# Altium PCB PCB1.PcbDoc
Units mm, origin at the board's own origin, x right, y up, seen from the top; angles counter-clockwise.
Board outline 65 x 30 mm, 2 copper layers (Top Layer, Bottom Layer), stack 1.201 mm thick; 42 components, 61 nets, 241 pads, 182 vias.
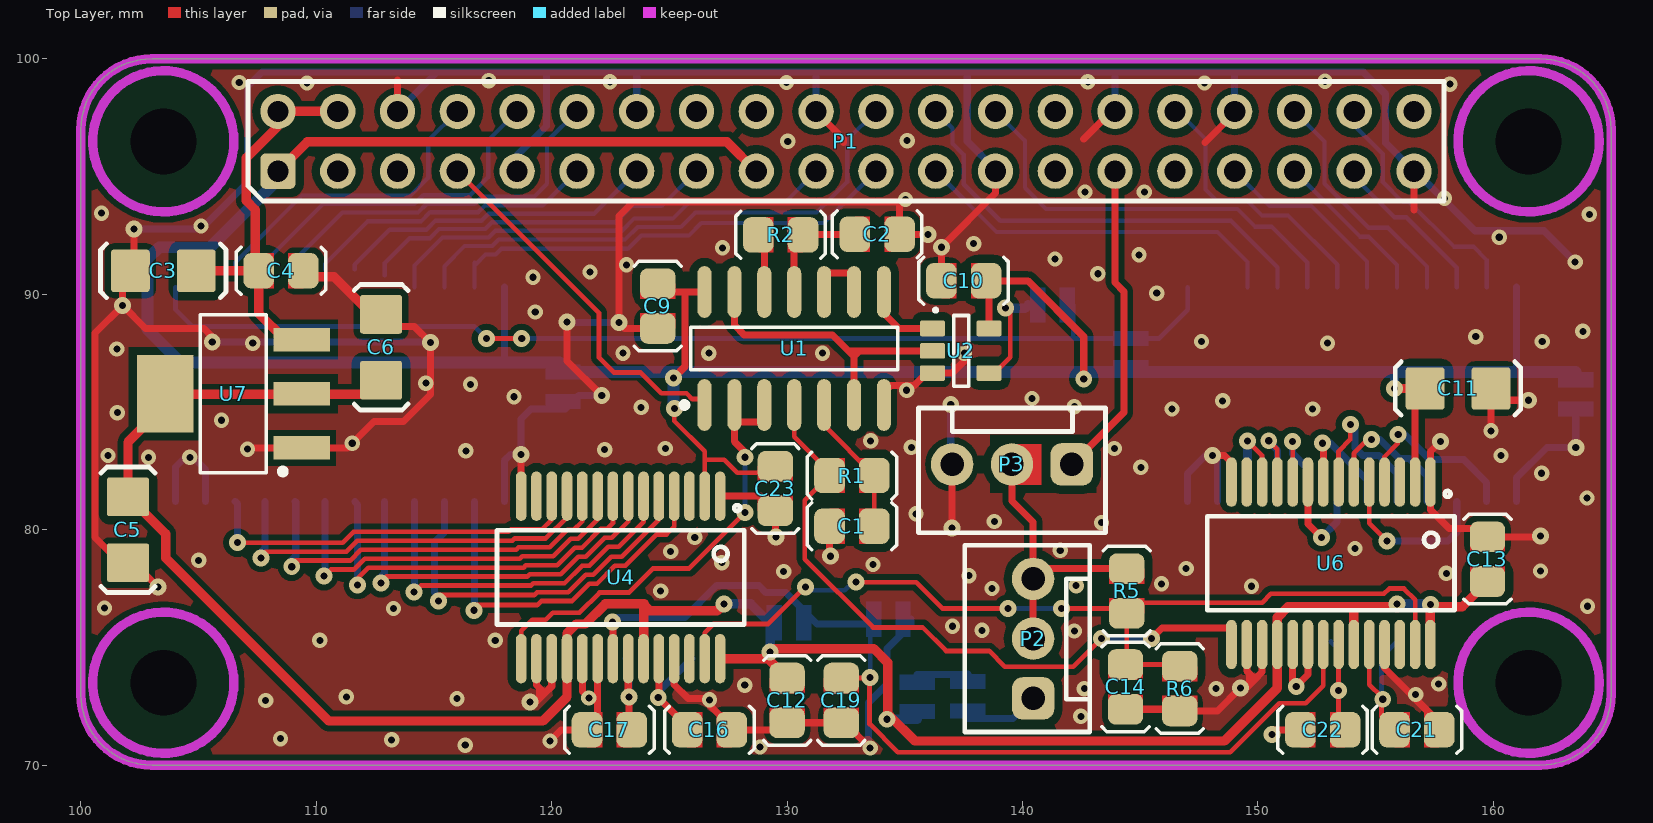
[diagram p0: Top Layer view]
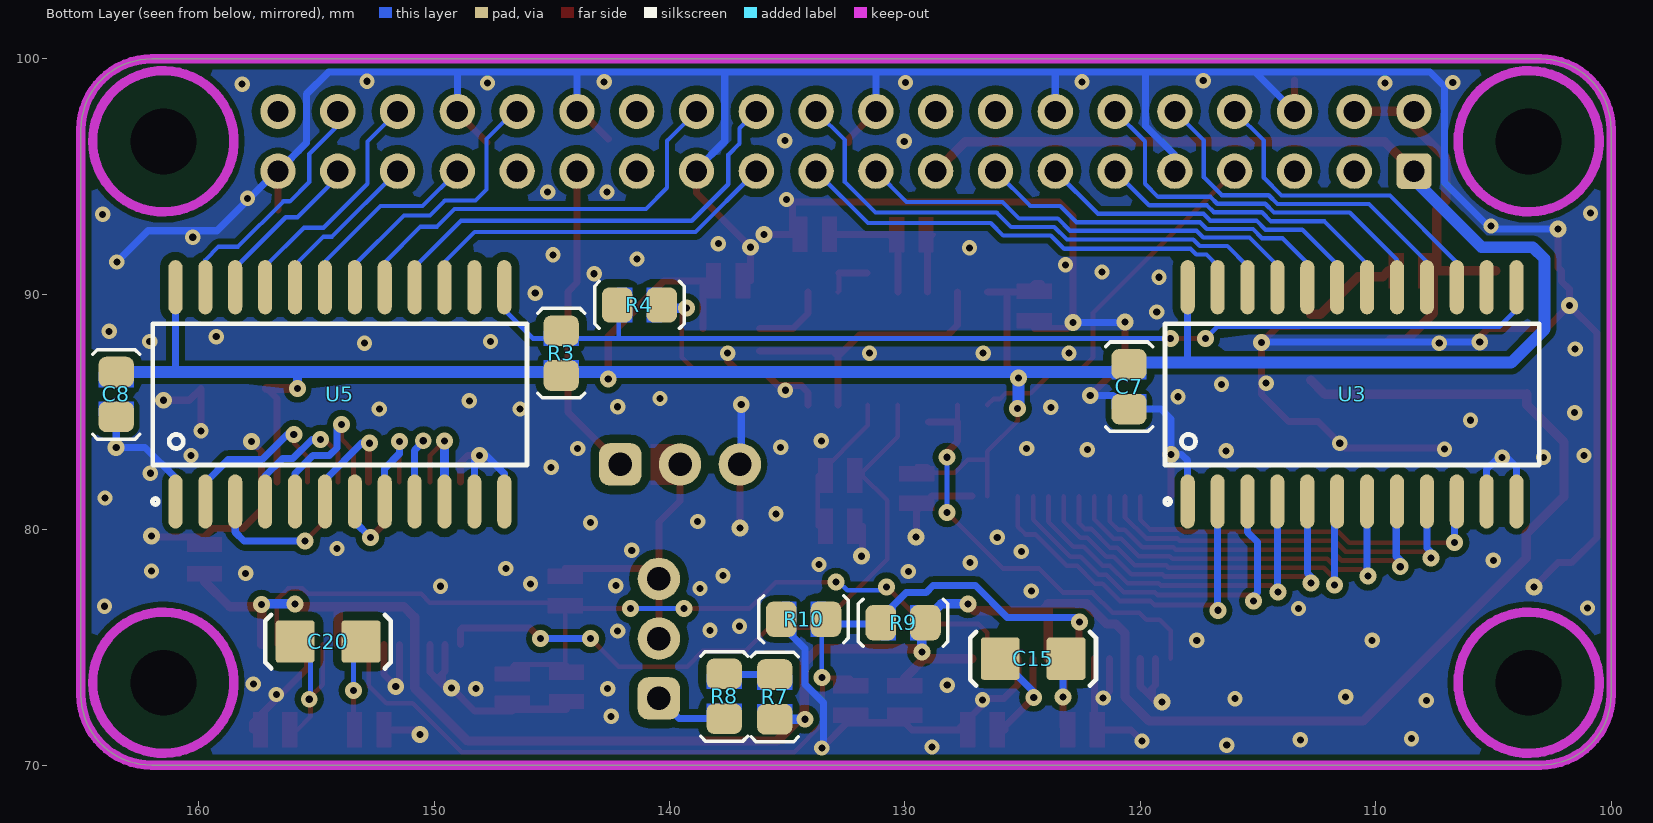
[diagram p1: Bottom Layer view, seen from below]

## Layer stack, top to bottom
Top Solder: solder mask 0.0102, Solder Resist, Dk 3.5
Top Layer: signal copper 0.0356
Dielectric 1: dielectric 1.13, FR-4, Dk 4.8
Bottom Layer: signal copper 0.0356
Bottom Solder: solder mask 0.0102, Solder Resist, Dk 3.5

## Board outline
100,73 100,97 cw(c103,97) 103,100 162,100 cw(c162,97) 165,97 165,73 cw(c162,73) 162,70 103,70 cw(c103,73)

## Design rules (kind name [scope] priority, off if disabled: settings)
Clearance Clearance_2 [Name Like '*-1111'] p1: gap=1
Clearance Clearance_1 [InPolygon vs IsPad] p2: gap=0.356
Clearance Clearance_3 [InPolygon] p3: gap=0.25
Clearance [All] p4: gap=0.18
HoleSize [All] p1 off: absolutevalues=TRUE maxlimit=2.54 minlimit=0.025 maxpercent=80.000 minpercent=20.000
PasteMaskExpansion [All] p1: expansion=0.05
PolygonConnect PolygonConnect_1 [All vs IsVia] p1: connectstyle=Direct reliefconductorwidth=0.254 reliefentries=4 polygonreliefangle="90 Angle" airgapwidth=0.254
PolygonConnect [All] p2: connectstyle=NoConnect reliefconductorwidth=0.254 reliefentries=4 polygonreliefangle="90 Angle" airgapwidth=0.254
RoomDefinition Sheet1 [InComponentClass('Sheet1')] p1 off: confinementstyle=ConfineIn formatcopy=TRUE lockcomponents=FALSE outline 511,187.625 493.601,187.625 493.601,140 511,140
RoutingVias [All] p1: holewidth=0.3 width=0.72 viastyle="Through Hole" minholewidth=0.3 minwidth=0.72 maxholewidth=0.3 maxwidth=0.72
SolderMaskExpansion [All] p1: expansion=0.102
Width [All] p1: maxlimit=3.048 minlimit=0.18 preferedwidth=0.18
27 further rules are at their usual default settings.

## Components (designator, comment, footprint, x,y, rotation, side; value= is the part's Value field where it differs from the comment)
C1 "100p" 0805RC 132.75,80.15 r0 top
C2 "N.S." 0805RC 133.825,92.55 r180 top
C3 "10u" 1206RC 103.5,91 r0 top
C4 "0.1u" 0805RC 108.5,91 r180 top
C5 "10u" 1206RC 102,80 r90 top
C6 "10u" 1206RC 112.75,87.75 r270 top
C7 "0.1u" 0805RC 120.475,86.075 r90 bottom
C8 "0.1u" 0805RC 163.5,85.75 r90 bottom
C9 "0.1u" 0805RC 124.5,89.5 r90 top
C10 "0.1u" 0805RC 137.5,90.575 r0 top
C11 "10u" 1206RC 158.5,86 r180 top
C12 "0.1u" 0805RC 130,72.75 r90 top
C13 "0.1u" 0805RC 159.75,78.75 r270 top
C14 "N.S." 0805RC 144.375,73.325 r90 top
C15 "10u" 1206RC 124.55,74.525 r0 bottom
C16 "0.1u" 0805RC 126.7,71.5 r0 top
C17 "0.1u" 0805RC 122.45,71.5 r0 top
C19 "0.1u" 0805RC 132.3,72.75 r90 top
C20 "10u" 1206RC 154.5,75.25 r0 bottom
C21 "0.1u" 0805RC 156.75,71.5 r0 top
C22 "0.1u" 0805RC 152.75,71.5 r0 top
C23 "0.1u" 0805RC 129.5,81.75 r90 top
P1 "Header 20X2" PLD-40 132.5,96.5 r0 top locked
P2 "Header 3" WF-3 140.45,75.375 r270 top
P3 "Header 3" WF-3 139.55,82.775 r0 top
R1 "100" 0805R 132.75,82.3 r0 top
R2 "51" 0805R 129.725,92.525 r0 top
R3 "N.S." 0805R 144.6,87.5 r270 bottom
R4 "0" 0805R 141.275,89.55 r0 bottom
R5 "1k" 0805R 144.425,77.4 r90 top
R6 "1k" 0805R 146.675,73.25 r90 top
R7 "1k" 0805R 135.525,72.9 r270 bottom
R8 "1k" 0805R 137.675,72.925 r270 bottom
R9 "150" 0805R 130.075,76.05 r180 bottom
R10 "150" 0805R 134.3,76.2 r180 bottom
U1 "74LVC14AD" M14A_N 130.3,87.7 r90 top
U2 "SN74LVC1G02DBV" SOT-23-5L 137.375,87.6 r0 top
U3 "SN74LVC841ADW" DW024_N 111,85.75 r90 bottom
U4 "AD9200AR" RS-28_N 122.925,77.975 r270 top
U5 "SN74LVC841ADW" DW024_N 154,85.75 r90 bottom
U6 "AD9200AR" RS-28_N 153.1,78.575 r270 top
U7 "LD1117S33TR" SOT223-4N 106.475,85.775 r180 top

## Footprints (in the part's own frame and the unit in brackets; to place one, negate y for a bottom-side part, rotate by r counter-clockwise, add the part's x,y. Pads: shape width x height; smd on the part's side, far side on the other; paste and mask are expansions set on the pad)
0805R [mm] "Chip Resistor"
  rrect50% 1.3x1.5 smd paste-5 mask+0.102: 1(-0.95,0) 2(0.95,0)
  Top Layer region: 0.3,-0.75 0.95,-0.75 0.95,0.75 0.3,0.75
  Top Layer region: -0.95,-0.75 -0.3,-0.75 -0.3,0.75 -0.95,0.75
  silkscreen extent -1.9,-1 1.9,1, body extent -1.15,-0.67 1.15,0.68, height 0.76
0805RC [mm] "Chip Capacitor"
  rrect50% 1.3x1.5 smd paste-5 mask+0.102: 1(-0.95,0) 2(0.95,0)
  Top Layer region: -0.95,-0.75 -0.3,-0.75 -0.3,0.75 -0.95,0.75
  Top Layer region: 0.3,-0.75 0.95,-0.75 0.95,0.75 0.3,0.75
  silkscreen extent -1.9,-1 1.9,1, body extent -0.95,-0.56 1.05,0.64, height 1.2
1206RC [mm] "Chip Capacitor"
  rrect15% 1.65x1.8 smd paste-5: 1(-1.4,0) 2(1.4,0)
  silkscreen extent -2.67,-1.14 2.67,1.14, body extent -1.6,-0.81 1.6,0.79, height 1.6
DW024_N [mm] "SOIC, 24-Leads, Body 15.4x7.5mm, Pitch 1.27mm, IPC Medium Density"
  oval 2.3x0.6 smd: 1(-4.55,6.985) 2(-4.55,5.715) 3(-4.55,4.445) 4(-4.55,3.175) 5(-4.55,1.905) 6(-4.55,0.635) 7(-4.55,-0.635) 8(-4.55,-1.905) 9(-4.55,-3.175) 10(-4.55,-4.445) 11(-4.55,-5.715) 12(-4.55,-6.985) 13(4.55,-6.985) 14(4.55,-5.715) 15(4.55,-4.445) 16(4.55,-3.175) 17(4.55,-1.905) 18(4.55,-0.635) 19(4.55,0.635) 20(4.55,1.905) 21(4.55,3.175) 22(4.55,4.445) 23(4.55,5.715) 24(4.55,6.985)
  silkscreen extent -4.67,-7.95 3,7.96, body extent -5.25,-7.82 5.15,7.58, height 2.6
M14A_N [mm] "SOIC, 14-Leads, Body 8.6x3.9mm, Pitch 1.27mm, IPC Medium Density"
  oval 2.2x0.6 smd paste-5: 1(-2.4,3.81) 2(-2.4,2.54) 3(-2.4,1.27) 4(-2.4,0) 5(-2.4,-1.27) 6(-2.4,-2.54) 7(-2.4,-3.81) 8(2.4,-3.81) 9(2.4,-2.54) 10(2.4,-1.27) 11(2.4,0) 12(2.4,1.27) 13(2.4,2.54) 14(2.4,3.81)
  silkscreen extent -2.52,-4.4 0.9,4.78, body extent -3,-4.37 3,4.38, height 1.75
PLD-40 [mm] "Connector 20x2"
  rrect30% 1.5x1.5 hole 0.9: 1(-24.13,-1.27)
  round 1.5 hole 0.9: 2(-24.13,1.27) 3(-21.59,-1.27) 4(-21.59,1.27) 5(-19.05,-1.27) 6(-19.05,1.27) 7(-16.51,-1.27) 8(-16.51,1.27) 9(-13.97,-1.27) 10(-13.97,1.27) 11(-11.43,-1.27) 12(-11.43,1.27) 13(-8.89,-1.27) 14(-8.89,1.27) 15(-6.35,-1.27) 16(-6.35,1.27) 17(-3.81,-1.27) 18(-3.81,1.27) 19(-1.27,-1.27) 20(-1.27,1.27) 21(1.27,-1.27) 22(1.27,1.27) 23(3.81,-1.27) 24(3.81,1.27) 25(6.35,-1.27) 26(6.35,1.27) 27(8.89,-1.27) 28(8.89,1.27) 29(11.43,-1.27) 30(11.43,1.27) 31(13.97,-1.27) 32(13.97,1.27) 33(16.51,-1.27) 34(16.51,1.27) 35(19.05,-1.27) 36(19.05,1.27) 37(21.59,-1.27) 38(21.59,1.27) 39(24.13,-1.27) 40(24.13,1.27)
  silkscreen extent -25.4,-2.54 25.4,2.54, body extent -25.4,-2.54 25.4,2.54, height 8.54
RS-28_N [mm] "SOP, 28-Leads, Body 10.2x5.3mm, Pitch 0.65mm, IPC Medium Density"
  oval 2.1x0.45 smd: 1(-3.45,4.225) 2(-3.45,3.575) 3(-3.45,2.925) 4(-3.45,2.275) 5(-3.45,1.625) 6(-3.45,0.975) 7(-3.45,0.325) 8(-3.45,-0.325) 9(-3.45,-0.975) 10(-3.45,-1.625) 11(-3.45,-2.275) 12(-3.45,-2.925) 13(-3.45,-3.575) 14(-3.45,-4.225) 15(3.45,-4.225) 16(3.45,-3.575) 17(3.45,-2.925) 18(3.45,-2.275) 19(3.45,-1.625) 20(3.45,-0.975) 21(3.45,-0.325) 22(3.45,0.325) 23(3.45,0.975) 24(3.45,1.625) 25(3.45,2.275) 26(3.45,2.925) 27(3.45,3.575) 28(3.45,4.225)
  silkscreen extent -3.07,-5.25 2,5.25, body extent -3.88,-5.16 3.88,5.17, height 2.15
SOT223-4N [mm] "SOT223, 4-Leads, Body 6.5x3.5mm, Pitch 2.3mm, Lead Span 7mm, IPC Medium Density"
  rect 2.4x1 smd: 1(-2.9,2.3) 2(-2.9,0) 3(-2.9,-2.3)
  rect 2.4x3.3 smd: 4(2.9,0)
  silkscreen extent -2.23,-3.35 1.4,3.42, body extent -3.54,-3.25 3.54,3.25, height 1.65
SOT-23-5L [mm] "SOT23, 5-Leads, Body 2.9x1.6mm, Pitch 0.95mm, Lead Span 2.8mm, IPC Medium Density"
  rrect25% 1.067x0.671 smd paste-5: 1(-1.2,0.95) 2(-1.2,0) 3(-1.2,-0.95) 4(1.2,-0.95) 5(1.2,0.95)
  silkscreen extent -1.14,-1.5 0.33,1.8, body extent -1.33,-1.5 1.17,1.5, height 1.1
WF-3 [mm]
  rrect50% 1.8x1.8 hole 1: 1(2.54,0)
  round 1.8 hole 1: 2(0,0) 3(-2.54,0)
  silkscreen extent -3.97,-2.9 3.97,2.4, body extent -3.9,-3.2 3.9,2.7, height 11.73

## Part data
C1 C2 C3 C4 C5 C6 C7 C8 C9 C10 C11 C12 C13 C14 C15 C16 C17 C19 C20 C21 C22 C23: library part Cap, "Capacitor"
P1: "Header, 40-Pin"
P2 P3: "WF-3 etc"
R1 R2 R3 R4 R5 R6 R7 R8 R9 R10: library part Res1, "Resistor"
U1: library part 74ACT14SC, "Hex Schmitt-Trigger Inverter, 14-Pin SOIC, Commercial Grade"
U3 U5: "10-Bit Bus-Interface D-Type Latch with 3-State Outputs"
U4 U6: "Single 10-bit ADC Parallel 20MSPS"
U7: "Fixed Low Drop Positive Voltage Regulator, 3.3V, 4-Pin SOT-223, Tape and Reel"

## Free pads (board coordinates)
  round 0 hole 2.8 unplated: 0(103.5,73.5) 0(103.5,96.5) 0(161.5,73.5) 0(161.5,96.5)

## Via types
v1: diameter 0.65, hole 0.3, Top Layer to Bottom Layer, tented both sides, 114 vias
v2: diameter 0.72, hole 0.3, Top Layer to Bottom Layer, tented both sides, 68 vias

## Nets (pads, with @x,y where several pads share a name; then routed paths per layer and width w, separated by ;. In a path a pad name is that pad's centre, name@x,y a point inside that pad or via, vN(x,y) a via of type N, cw(c..) or ccw(c..) an arc to the next point about the centre after c; other vN are vias at no path point)
+5V: C3.2 C4.2 P1.2 P1.4 U7.3 | length 16.6
  Top Layer w0.4: C3.2 C4.2 107.55,89.2 108.675,88.075 U7.3 ; C4.2@107.406,91.144 107.406,93.594 107.028,93.972 107.028,95.798 108.37,97.14 P1.2 P1.4
A_IN: P1.29 P3.1 | length 13.5
  Top Layer w0.3: P3.1 144.3,84.985 144.3,90.125 143.93,90.495 P1.29
ADC_CLK1: U1.2 U1.3 U4.15 | length 18.9
  Top Layer w0.2: U4.15 118.7,75.7 119.175,76.175 119.75,76.175 120.05,76.475 121.175,76.475 122.03,77.33 123.28,77.33 124.3,78.35 125.827,78.35 v2(128.206,80.729) ; U1.2 U1.2@127.76,84.585 ; v2@128.2,83.3 128.2,83 128.206,83.006 v2(128.206,83.079) ; U1.2@127.76,84.585 127.76,84.575 127.75,84.575 U1.2@127.76,84.585
  Top Layer w0.3: v2@128.2,83.3 127.76,83.74 127.76,84.575 U1.3@129,84.575
  Bottom Layer w0.2: v2(128.206,80.729) v2(128.206,83.079)
ADC_CLK2: R1.1 U1.4 U6.15 | length 29
  Top Layer w0.2: U1.4 130.3,83.95 131.8,82.45 R1.1 130.75,81.25 130.75,78.75 133.65,75.85 135.75,75.85 136.75,74.85 138.575,74.85 139.25,74.175 142.15,74.175 v2(143.35,75.375)
  Top Layer w0.3: v2(145.475,75.375) 145.925,75.825 148.8,75.825 148.875,75.75 U6.15
  Bottom Layer w0.3: v2(143.35,75.375) v2(145.475,75.375)
AVCC: C5.2 C6.2 C12.2 C13.2 R7.2 R9.2 U4.18 U4.23 U4.28 U6.18 U6.23 U6.28 U7.2 U7.4 | length 100.1
  Top Layer w0.4: C6.2 112.15,85.75 103.6,85.75 U7.4 103.575,85.3 102,83.725 C5.2 102.025,81.4 103.6,79.825 103.6,78.8 110.525,71.875 119.625,71.875 120.65,72.9 120.65,75.6 121.045,75.995 121.424,75.995 122.279,76.85 123.925,76.85 ; U4.23 123.9,76.825 124.175,76.55 127.025,76.55 v2(127.325,76.85) ; U4.28 129.175,74.525 C12.2 ; v2(129.275,74.8) 129.425,74.95 133.675,74.95 134.265,74.36 v2@134.265,71.965 ; v2(134.25,71.95) v2@134.265,71.965 ; v2@134.35,72.05 v2@134.265,71.965 ; v2@134.375,72.075 135.425,71.025 148.575,71.025 150.825,73.275 U6.18 150.825,76.275 151.275,76.725 154.075,76.725 ; U6.23 154.075,76.725 ; v2(155.9,76.85) 155.9,76.725 154.075,76.725 ; U6.28 157.325,76.725 158.675,76.725 C13.2
  Bottom Layer w0.4: v2(127.325,76.85) 128.45,76.85 129.275,76.025 v2(129.275,74.8) v2@129.35,74.8 ; v2(134.25,71.95) R7.2 ; v2(155.9,76.85) 157.3,76.85 v2(157.325,76.825)
CLK_IN: P1.7 U1.1 | length 15.7
  Top Layer w0.2: P1.7 122.006,89.214 122.006,87.319 122.644,86.681 123.769,86.681 124.65,85.8 125.725,85.8 125.975,85.55 126.24,85.55 U1.1
DA0: P1.21 U3.23 | length 19.8
  Bottom Layer w0.18: U3.23 U3.23@116.715,91.215 ; U3.23@116.715,91.34 U3.23@116.715,91.215 ; P1.21 131.565,93.025 126.35,93.025 125.825,92.5 123.8,92.5 123.233,91.933 117.867,91.933 117.624,91.69 117.19,91.69 U3.23@116.715,91.215
DA1: P1.22 U3.22 | length 23
  Bottom Layer w0.18: U3.22 115.445,91.195 116.3,92.05 117.475,92.05 117.75,92.325 123.116,92.325 123.651,92.86 125.485,92.86 126.1,93.475 131.25,93.475 132.55,94.775 132.55,96.55 P1.22
DA2: P1.19 U3.21 | length 19.6
  Bottom Layer w0.18: U3.21 114.175,91.222 115.363,92.41 117.326,92.41 117.616,92.7 122.982,92.7 123.502,93.22 125.145,93.22 125.85,93.925 129.925,93.925 P1.19
DA3: P1.15 U3.20 | length 15.4
  Bottom Layer w0.18: U3.20@112.905,90.8 112.905,91.33 113.955,92.38 114.824,92.38 115.214,92.77 117.177,92.77 117.467,93.06 122.71,93.06 123.4,93.75 124.67,93.75 P1.15
DA4: P1.13 U3.19 | length 13.8
  Bottom Layer w0.18: U3.19@111.635,91.05 111.635,91.26 113.115,92.74 114.675,92.74 115.065,93.13 117.028,93.13 117.318,93.42 121.8,93.42 P1.13
DA5: P1.11 U3.18 | length 12.6
  Bottom Layer w0.18: U3.18@110.365,91.05 110.365,91.29 112.175,93.1 114.45,93.1 114.84,93.49 116.879,93.49 117.169,93.78 119.62,93.78 P1.11
DA6: P1.12 U3.17 | length 16.1
  Bottom Layer w0.18: U3.17@109.095,91.05 109.095,91.47 111.1,93.475 114.316,93.475 114.691,93.85 116.729,93.85 117.019,94.14 119.24,94.14 119.8,94.7 119.8,96.5 P1.12
DA7: P1.10 U3.16 | length 14.6
  Bottom Layer w0.18: U3.16@107.825,91.05 107.825,91.375 110.285,93.835 114.167,93.835 114.542,94.21 116.535,94.21 117.3,94.975 117.3,96.54 P1.10
DA8: P1.8 U3.15 | length 13.3
  Bottom Layer w0.18: U3.15@106.555,91.05 106.555,91.355 109.395,94.195 113.995,94.195 114.75,94.95 114.75,96.53 P1.8
DB0: P1.38 U5.23 | length 10.4
  Bottom Layer w0.18: P1.38 154.09,97.166 155.3,95.956 155.3,94.775 156.125,93.95 156.4,93.95 158.325,92.025 159.15,92.025 159.715,91.46 U5.23
DB1: P1.37 U5.22 | length 7
  Bottom Layer w0.18: P1.37 154.09,94.985 155.8,93.275 156.3,93.275 158.445,91.13 U5.22
DB2: P1.36 U5.21 | length 10.3
  Bottom Layer w0.18: P1.36 152.825,96.495 152.825,94.7 154.7,92.825 155.525,92.825 157.175,91.175 U5.21
DB3: P1.35 U5.20 | length 7
  Bottom Layer w0.18: P1.35 154.33,92.45 154.7,92.45 155.905,91.245 U5.20
DB4: P1.33 U5.19 | length 8.3
  Bottom Layer w0.18: P1.33 150.49,93.75 152.275,93.75 154.635,91.39 U5.19
DB5: P1.32 U5.18 | length 11.8
  Bottom Layer w0.18: P1.32 146.605,97.77 147.775,96.6 147.775,94.45 148.24,93.985 149.54,93.985 150.175,93.35 151.275,93.35 153.365,91.26 U5.18
DB6: P1.26 U5.17 | length 18.1
  Bottom Layer w0.18: P1.26 140.1,96.52 140.1,94.525 141,93.625 149.125,93.625 149.875,92.875 150.575,92.875 152.095,91.355 U5.17
DB7: P1.24 U5.16 | length 19.2
  Bottom Layer w0.18: P1.24 137.025,97.055 137.025,96.4 137.5,95.925 137.5,94.675 139.05,93.125 148.85,93.125 150.825,91.15 U5.16
DB8: P1.23 U5.15 | length 15.9
  Bottom Layer w0.18: P1.23 138.89,92.65 148.275,92.65 149.555,91.37 U5.15
GND: C1.1 C2.1 C3.1 C4.1 C5.1 C6.1 C7.1 C8.1 C9.1 C10.1 C11.1 C12.1 C13.1 C14.1 C16.2 C17.1 C19.1 C21.2 C22.1 C23.1 P1.6 P1.9 P1.14 P1.20 P1.25 P1.30 P1.34 P1.39 P3.3 R6.1 R10.1 U1.7 U2.3 U3.1 U3.11 U3.12 U4.1 U4.14 U4.16 U4.17 U4.19 U4.20 U4.25 U5.1 U5.11 U5.12 U6.1 U6.14 U6.16 U6.17 U6.19 U6.20 U6.25 U7.1 | length 278.3
  Top Layer w0.3: v2(102.25,92.775) 102.25,91.15 C3.1 102.1,90.55 101.775,90.225 v2(101.775,89.525) ; v2(103.275,77.575) 102.25,78.6 C5.1 101.675,78.6 100.6,79.675 100.6,88.35 v2(101.775,89.525) ; v2(105.58,87.979) 105.559,88 105.559,88.216 105.225,88.55 102.75,88.55 v2(101.775,89.525) ; v1@107.125,83.475 U7.1 111.325,83.475 112.45,84.6 113.7,84.6 114.85,85.75 v2(114.85,87.95) 114.175,88.625 C6.1@113.275,88.625 ; P1.6 113.45,99.1 ; U4.14 v2(118.7,83.2) ; v2(119.075,72.675) 119.325,72.675 119.475,72.825 ; U4.16 119.35,73.4 119.475,73.275 ; v1(119.925,71.025) 120.4,71.5 C17.1 ; U4.17 120,73.35 119.7,73.05 ; v2(120.65,88.825) 120.65,87.175 v2(122.125,85.7) ; U4.19 121.3,73.125 v1(121.575,72.85) 121.95,72.85 ; C17.1@121.95,71.95 121.95,72.85 ; U4.20 121.95,72.85 ; C9.1 123.1,88.55 v2(122.85,88.8) 122.85,93.325 123.45,93.925 134.775,93.925 C2.1 v2(135.975,92.55) ; U4.25 125.2,73.425 125.8,72.825 126.425,72.825 C16.2@127.65,71.6 ; U4.1 128.875,81.425 C23.1 129.5,79.725 v2(129.525,79.7) ; C16.2 129.7,71.5 C12.1 C19.1 132.45,71.8 v1(133.525,70.725) ; P1.20 132.4,96.6 132.4,96.45 ; C1.1 131.8,78.925 v2(131.85,78.875) ; U1.7 134.11,85.835 134.4,86.125 135.4,86.125 135.925,86.65 U2.3 137,86.65 137.525,87.175 v1(137.525,87.5) ; C10.1 v2(136.55,92) 138.85,94.3 P1.25 ; v2(137,80.075) 137.01,80.085 P3.3 ; 142.6,96.6 143.77,97.77 P1.30 ; C14.1 146.6,72.375 R6.1 148.275,72.3 v2(149.25,73.275) 149.5,73.275 149.65,73.425 ; 147.75,96.45 149.01,97.71 P1.34 ; v2(148.075,83.15) 148.575,83.15 148.875,82.85 U6.14 ; U6.16 149.525,74 149.65,73.875 ; U6.17 150.175,73.95 149.875,73.65 ; v2(150.6,71.3) 150.6,71.5 C22.1 ; U6.19 151.475,73.5 v2(151.625,73.35) 152.125,73.85 U6.20 ; U6.25 155.375,74.125 157.7,71.8 C21.2 ; 156.63,93.58 P1.39 ; v2(157.75,83.75) 157.325,83.325 U6.1 157.325,80.85 158.125,80.05 159.4,80.05 C13.1 161.975,79.7 v2(162,79.725) ; v1@159.9,84.45 C11.1 160.4,85.5 v2(161.5,85.5) ; 119.475,72.825 119.7,73.05 ; 119.475,72.825 119.475,73.275 ; 119.475,73.275 119.7,73.05 ; 149.65,73.425 149.65,73.875 ; 149.65,73.425 149.875,73.65 ; 149.65,73.875 149.875,73.65
  Top Layer w0.4: C4.1 109.7,90.75 110.75,90.75 112.35,89.15 C6.1
  Bottom Layer w0.3: v2(102.25,92.775) 105.1,92.775 107.075,94.75 107.075,98.825 107.7,99.45 115.13,99.45 ; U3.12 104.015,82.665 104.375,83.025 104.825,83.025 105.285,82.565 U3.11 ; v2(105.58,87.979) 114.821,87.979 v2(114.85,87.95) ; P1.6 115.13,99.45 ; U3.1 117.985,82.935 118.25,83.2 v2(118.7,83.2) 118.7,84.7 119.125,85.125 C7.1 120.575,85.125 121.15,85.7 v2(122.125,85.7) v2@122,85.575 ; P1.9 118.53,95.905 119.775,97.15 119.775,99.375 ; v2(120.65,88.825) 120.675,88.8 v2(122.85,88.8) ; P1.14 123.61,99.44 123.6,99.45 ; P1.20 131.23,99.445 131.225,99.45 ; v1@133.45,70.925 133.45,72.65 134.25,73.45 134.25,74.95 135.25,75.95 R10.1 ; v2(136.95,85.325) 136.95,82.835 P3.3 ; P1.25 138.85,95.3 137.65,96.5 137.65,99.45 ; P1.30 143.93,99.38 ; U5.12 147.015,82.39 147.775,83.15 v2(148.075,83.15) 148.285,82.94 U5.11 ; P1.34 149.01,99.41 ; U5.1 160.985,82.21 162.275,83.5 v2(163.5,83.5) C8.1 ; v1(163.475,91.375) 162.15,92.7 159.225,92.7 156.695,95.23 P1.39 156.62,95.23 155.425,96.425 155.425,98.5 154.475,99.45 137.65,99.45 ; 115.13,99.45 123.6,99.45 ; 123.6,99.45 131.225,99.45 ; 131.225,99.45 137.65,99.45
  other v1: 128.85,70.775 116.325,70.85 113.2,71.075 108.475,71.125 142.475,72.075 107.85,72.75 126.7,72.775 115.975,72.825 111.275,72.9 156.7,73 142.625,73.25 148.225,73.25 128.2,73.4 157.675,73.45 110.15,75.3 117.6,75.3 142.2,75.7 138.275,75.725 137.025,75.9 113.275,76.65 101,76.675 164,76.75 124.625,77.4 138.7,77.5 149.725,77.6 142.275,77.625 145.9,77.7 137.725,78.05 158,78.15 129.85,78.225 162,78.25 146.95,78.35 133.65,78.525 127.225,78.6 105,78.7 125.05,79.075 141.6,79.125 154.125,79.2 126.075,79.675 143.35,80.3 138.8,80.35 135.475,80.675 163.975,81.35 162.05,82.4 145.025,82.65 102.875,83.075 104.625,83.075 101.15,83.15 160.325,83.15 116.35,83.35 122.25,83.4 107.075,83.425 124.825,83.45 143.9,83.45 135.275,83.5 111.525,83.675 133.55,83.775 159.9,84.2 105.975,84.65 101.55,84.975 146.35,85.125 152.325,85.125 123.8,85.2 142.2,85.225 148.5,85.475 140.4,85.575 118.4,85.65 135.075,85.925 116.55,86.175 114.65,86.225 123.025,87.5 126.675,87.5 131.5,87.5 101.525,87.675 107.3,87.925 152.95,87.925 147.6,88 162.075,88 159.25,88.2 163.8,88.425 119.3,89.25 145.7,90.05 119.2,90.725 143.2,90.875 121.625,90.95 123.175,91.25 141.375,91.5 144.95,91.675 127.25,91.975 137.925,92.15 160.25,92.425 105.1,92.9 164.075,93.4 100.875,93.45 135.025,94.025 157.925,94.075 142.65,94.35 145.175,94.35 130.025,96.5 135.1,96.525 158.15,98.925 109.6,98.975 147.725,98.975 106.725,99 129.975,99 122.475,99.025 142.775,99.025 152.85,99.05 117.325,99.075
LATCH: R3.1 R4.2 U3.13 U5.13 | length 47.4
  Top Layer w0.2: v2(117.225,88.125) v2(118.725,88.125)
  Bottom Layer w0.2: U3.13 104.015,89.36 104.737,88.638 116.712,88.638 v2(117.225,88.125) ; v2(118.725,88.125) 142.175,88.125 ; R4.2@142.15,89.55 142.15,88.15 142.175,88.125 ; U5.13 147.015,89.34 145.8,88.125 142.175,88.125
NetC1_2: C1.2 R1.2 U1.5 | length 6
  Top Layer w0.2: U1.5 131.57,84.43 R1.2 C1.2
NetC2_2: C2.2 R2.2 U1.11 | length 4.8
  Top Layer w0.2: R2.2@130.3,92.15 R2.2
  Top Layer w0.3: U1.11 R2.2@130.3,92.15 ; R2.2 130.7,92.55 C2.2
NetC14_2: C14.2 R5.1 R6.2 U4.27 U6.27 | length 39.7
  Top Layer w0.2: U4.27 126.5,75.625 126.875,76 129.2,76 v2(130.775,77.575) ; v2@132.875,77.775 v2(132.925,77.775) 135.475,77.775 136.6,76.65 v2(139.375,76.65) ; v2(141.65,76.65) R5.1@144.225,76.65 ; R6.2 146.6,74.275 C14.2 144.425,74.325 R5.1 144.875,76.9 150.175,76.9 150.55,77.275 155.35,77.275 155.575,77.5 156.2,77.5 156.675,77.025 U6.27
  Bottom Layer w0.2: v2(130.775,77.575) 130.925,77.425 132.45,77.425 132.8,77.775 v2(132.925,77.775) ; v2(139.375,76.65) v2(141.65,76.65)
NetC15_1: C15.1 C17.2 U4.22 | length 4.6
  Top Layer w0.3: U4.22 123.25,72.925 v2(123.275,72.9) C17.2@123.275,71.625
  Bottom Layer w0.3: C15.1 123.275,74.4 v2(123.275,72.9)
NetC15_2: C15.2 C16.1 U4.24 | length 5.8
  Top Layer w0.3: U4.24 124.55,72.9 v2(124.525,72.875) 125.75,71.65 C16.1
  Bottom Layer w0.3: v2(124.525,72.875) 124.525,73.1 C15.2
NetC20_1: C20.1 C22.2 U6.22 | length 5.6
  Top Layer w0.2: C22.2@153.425,71.775 v2(153.425,73.175) U6.22
  Bottom Layer w0.2: C20.1 153.425,74.925 v2(153.425,73.175)
NetC20_2: C20.2 C21.1 U6.24 | length 6.8
  Top Layer w0.2: U6.24 154.725,73.425 155.25,72.9 155.25,72.05 C21.1
  Bottom Layer w0.2: v2(155.3,72.8) 155.25,72.85 155.25,74.6 C20.2
NetP2_1: P2.1 R8.2 | length 3.1
  Bottom Layer w0.3: R8.2 139.59,71.975 P2.1
NetP2_2: P2.2 P2.3 P3.2 R5.2 | length 11.8
  Top Layer w0.3: P3.2 139.55,81.225 140.45,80.325 P2.3@140.45,78.2 ; P2.2 P2.3 P2.3@140.45,78.2 ; R5.2 140.6,78.35 P2.3@140.45,78.2
NetR2_1: R2.1 U1.12 | length 2.5
  Top Layer w0.2: R2.1 R2.1@129.03,92.27
  Top Layer w0.3: U1.12 R2.1@129.03,92.27
NetR4_1: R4.1 U2.4 | length 4.4
  Top Layer w0.2: U2.4 138.8,86.65 139.475,87.325 139.475,89.224 v2(139.274,89.425)
  Bottom Layer w0.4: v2(139.274,89.425) 139.299,89.4 140.1,89.4 R4.1@140.25,89.55
NetR7_1: R7.1 R8.1 | length 2.2
  Bottom Layer w0.3: R7.1 137.65,73.85 R8.1
NetU1_6: U1.6 U1.13 U2.2 | length 13
  Top Layer w0.3: U1.13 127.76,88.69 128.175,88.275 131.925,88.275 132.6,87.6 ; U1.6 132.84,87.36 ; U2.2 133.08,87.6 ; 132.6,87.6 132.84,87.36 ; 132.6,87.6 133.08,87.6 ; 132.84,87.36 133.08,87.6
NetU1_8: U1.8 U2.1 | length 3.2
  Top Layer w0.3: U1.8 134.11,89.19 134.75,88.55 U2.1
NetU1_9: U1.9 U1.10 | length 2
  Top Layer w0.2: U1.9@132.8,90.9 132.8,90.14 U1.9
  Top Layer w0.3: U1.10@131.6,90.9 U1.9@132.8,90.9
NetU3_2: U3.2 U4.4 | length 16
  Top Layer w0.2: v2@116.65,76.634 116.816,76.8 119.38,76.8 119.55,76.97 120.857,76.97 121.597,77.71 121.922,77.71 122.682,78.47 123.132,78.47 124.462,79.8 124.875,79.8 125.2,80.125 U4.4
  Top Layer w0.3: v2@116.65,76.634 v2(116.706,76.579)
  Bottom Layer w0.3: v2(116.706,76.579) 116.715,76.588 U3.2
NetU3_3: U3.3 U4.5 | length 16.4
  Top Layer w0.2: v2(115.181,76.979) 115.2,76.998 115.2,77.225 119.25,77.225 119.375,77.35 120.7,77.35 121.44,78.09 121.765,78.09 122.525,78.85 122.975,78.85 124.55,80.425 U4.5
  Bottom Layer w0.3: v2(115.181,76.979) 115.181,77.181 115.025,77.336 115.025,79.475 115.445,79.895 U3.3
NetU3_4: U3.4 U4.6 | length 15.9
  Top Layer w0.2: v2(114.156,77.354) 114.432,77.63 119.118,77.63 119.218,77.73 120.543,77.73 121.288,78.475 121.6,78.475 122.4,79.275 122.837,79.275 123.9,80.338 U4.6
  Bottom Layer w0.3: v2(114.156,77.354) 114.175,77.373 U3.4
NetU3_5: U3.5 U4.7 | length 16.2
  Top Layer w0.2: v2(112.756,77.729) 112.756,77.781 112.985,78.01 118.96,78.01 119.06,78.11 120.385,78.11 121.13,78.855 121.443,78.855 122.243,79.655 122.555,79.655 123.25,80.35 U4.7
  Bottom Layer w0.2: v2@112.756,77.706 v2(112.756,77.729)
  Bottom Layer w0.3: v2(112.756,77.729) 112.756,78.006 112.905,78.155 U3.5
NetU3_6: U3.6 U4.8 | length 16.8
  Top Layer w0.2: v2(111.755,77.654) 111.75,77.659 111.75,77.93 112.21,78.39 118.803,78.39 118.903,78.49 120.228,78.49 120.973,79.235 121.285,79.235 122.085,80.035 122.36,80.035 122.6,80.275 U4.8
  Bottom Layer w0.2: v2(111.755,77.654) v2@111.755,77.795
  Bottom Layer w0.3: U3.6 111.755,81.08 v2@111.755,77.795
NetU3_7: U3.7 U4.9 | length 16.8
  Top Layer w0.2: v2(110.33,78.029) 110.612,78.31 111.593,78.31 112.053,78.77 118.645,78.77 118.745,78.87 120.07,78.87 120.815,79.615 121.128,79.615 121.95,80.437 U4.9
  Bottom Layer w0.3: v2(110.33,78.029) 110.365,78.063 U3.7
NetU3_8: U3.8 U4.10 | length 17.1
  Top Layer w0.2: v2(108.955,78.429) 108.955,78.505 109.14,78.69 111.435,78.69 111.895,79.15 118.488,79.15 118.588,79.25 119.913,79.25 120.658,79.995 120.945,79.995 121.3,80.35 U4.10
  Bottom Layer w0.3: v2(108.955,78.429) 108.955,78.705 109.125,78.875 109.125,81.17 U3.8
NetU3_9: U3.9 U4.11 | length 17.1
  Top Layer w0.2: v2(107.655,78.804) 107.655,78.88 107.845,79.07 111.278,79.07 111.738,79.53 118.331,79.53 118.431,79.63 119.744,79.63 120.65,80.536 U4.11
  Bottom Layer w0.3: v2(107.655,78.804) 107.655,79.055 107.825,79.225 U3.9
NetU3_10: U3.10 U4.12 | length 16.5
  Top Layer w0.2: v2(106.65,79.45) 111.12,79.45 111.58,79.91 118.173,79.91 118.273,80.01 119.585,80.01 120,80.425 U4.12
  Bottom Layer w0.3: U3.10 106.65,81.105 v2(106.65,79.45)
NetU5_2: U5.2 U6.4 | length 7.7
  Top Layer w0.2: U6.4 155.375,83.1 155.925,83.65 155.925,84.021 v2(155.958,84.054)
  Bottom Layer w0.3: v2(155.958,84.054) 156.221,84.054 157.3,82.975 158.75,82.975 159.715,82.01 U5.2
NetU5_3: U5.3 U6.5 | length 7.2
  Top Layer w0.2: U6.5 154.725,80.275 v2(155.475,79.525)
  Bottom Layer w0.3: v2(155.475,79.525) 158.075,79.525 158.445,79.895 U5.3
NetU5_4: U5.4 U6.6 | length 6.3
  Top Layer w0.2: U6.6 154.075,83.25 154.665,83.84 v2(154.815,83.84)
  Bottom Layer w0.3: v2(154.815,83.84) 155.185,83.84 156,83.025 156.425,83.025 157.175,82.275 U5.4
NetU5_5: U5.5 U6.7 | length 7.2
  Top Layer w0.2: U6.7 153.425,83.337 153.925,83.837 v2(153.925,84.475)
  Bottom Layer w0.3: v2(153.925,84.475) 154.125,84.275 154.125,83.475 154.45,83.15 155.15,83.15 155.905,82.395 U5.5
NetU5_6: U5.6 U6.8 | length 5.1
  Top Layer w0.3: v2(152.75,83.675) 152.775,83.65 U6.8
  Bottom Layer w0.3: v2(152.75,83.675) 153.075,83.675 154.635,82.115 U5.6
NetU5_7: U5.7 U6.9 | length 4.4
  Top Layer w0.3: U6.9 152.125,80.25 v2(152.7,79.675)
  Bottom Layer w0.3: v2(152.7,79.675) 153.365,80.34 U5.7
NetU5_8: U5.8 U6.10 | length 4.5
  Top Layer w0.2: U6.10 v2(151.475,83.75)
  Bottom Layer w0.3: v2(151.475,83.75) 151.475,83.225 152.095,82.605 U5.8
NetU5_9: U5.9 U6.11 | length 4.7
  Top Layer w0.2: v2@150.425,83.811 v2(150.457,83.779) 150.825,83.411 U6.11
  Bottom Layer w0.3: v2(150.457,83.779) 150.45,83.772 150.45,83.75 150.825,83.375 U5.9
NetU5_10: U5.10 U6.12 | length 4.6
  Top Layer w0.2: v2(149.55,83.775) 150.175,83.15 U6.12
  Bottom Layer w0.4: v2(149.55,83.775) 149.555,83.77 U5.10
REF_T: C19.2 R9.1 R10.2 U4.21 U6.21 | length 42.6
  Top Layer w0.2: C19.2@132.85,73.15 C19.2 v2@133.5,73.7 ; v2(133.525,73.725) v2@133.5,73.7 ; U6.21 152.775,73.375 152.025,72.625 150.9,72.625 148.82,70.545 134.705,70.545 133.5,71.75 v2@133.5,73.7
  Top Layer w0.3: v2(122.575,76.075) 122.6,76.05 U4.21
  Bottom Layer w0.2: v2(133.525,73.725) R10.2@133.525,76.025
  Bottom Layer w0.3: v2(122.575,76.075) 122.775,76.275 125.65,76.275 127,77.625 128.8,77.625 129.1,77.325 129.95,77.325 131.275,76 R10.2@133.325,76
VCC: C7.2 C8.2 C9.2 C10.2 C11.2 C23.2 P1.1 P1.17 R3.2 U1.14 U2.5 U3.24 U4.2 U5.24 U6.2 | length 130.8
  Top Layer w0.2: v2(125.206,85.154) 125.206,84.619 126.5,83.325 126.5,82.975 ; U4.2 126.5,82.975 ; C23.2 129.025,82.7 128.75,82.425 127.875,82.425 127.325,82.975 126.5,82.975
  Top Layer w0.3: C9.2@124.2,90.45 C9.2 124.85,90.1 125.67,90.1 ; v2(125.175,86.45) 125.67,86.945 125.67,90.1 ; U1.14 125.67,90.1 ; U2.5 138.575,90.45 C10.2 140.225,90.575 142.6,88.2 v2(142.6,86.4) ; U6.2 156.675,85.575 C11.2
  Top Layer w0.4: P1.1 109.615,96.475 127.445,96.475 P1.17 ; v2(155.8,86) C11.2
  Bottom Layer w0.3: 117.985,87.05 U3.24 ; v2(142.6,86.4) 142.6,86.65 v2@142.65,86.7 ; U5.24 160.985,86.815 161.1,86.7
  Bottom Layer w0.4: v2(155.8,86) 155.8,86.7
  Bottom Layer w0.5: P1.1 108.37,94.87 105.5,92 103.325,92 102.825,91.5 102.825,88.525 104.25,87.1 C7.2@120.325,87.1 ; C7.2@120.125,87.075 120.5,86.7 142.65,86.7 155.8,86.7 161.1,86.7 C8.2 ; v2(125.175,86.45) 125.175,85.185 v2(125.206,85.154)
pads on no net: P1.3 P1.5 P1.16 P1.18 P1.27 P1.28 P1.31 P1.40 U3.14 U4.3 U4.13 U4.26 U5.14 U6.3 U6.13 U6.26

## Polygon pours and split planes (outlines as drawn)
GND on Bottom Layer "B1p" (solid, remove dead copper, pour order 2): 100,100 100,70 165,70 165,100
GND on Top Layer "B1p" (solid, remove dead copper, pour order 4): 100,70 100,100 165,100 165,70

## Keep-outs
Keep-Out Layer:
  circle w0.4: c103.5,96.5 r3
  circle w0.4: c103.5,73.5 r3
  circle w0.4: c161.5,73.5 r3
  circle w0.4: c161.5,96.5 r3
  lines w0.4: 100,73 ccw(c103,73) 103,70 162,70 ccw(c162,73) 165,73 165,97 ccw(c162,97) 162,100 103,100 ccw(c103,97) 100,97 100,73

## Other copper
Top Layer:
  rectangle net NetP2_2: 139.55,81.9 140.8,83.65
  pour cut-out: 138.6,84.05 138.6,81.575 138.625,81.55 143.15,81.55 143.15,83.925 143.025,84.05

## Silkscreen, mask and mechanical layers (free items; w line width, h text height)
Shape:
  the board outline again, w0.1